# Altium PCB main_old.PcbDoc (part 7 of 15)
Units mil, origin at the board's own origin, x right, y up, seen from the top; angles counter-clockwise.
Board outline 8394.55 x 5164.44 mil, 7 copper layers (Top Layer 1, Layer 2, Layer 3, Unused, Layer 4_pow, Layer 5_gnd, Bottom 6+gnd), stack 46.112 mil thick; 363 components, 409 nets, 1750 pads, 991 vias.
Unrouted connection lines stored in the file: 1.
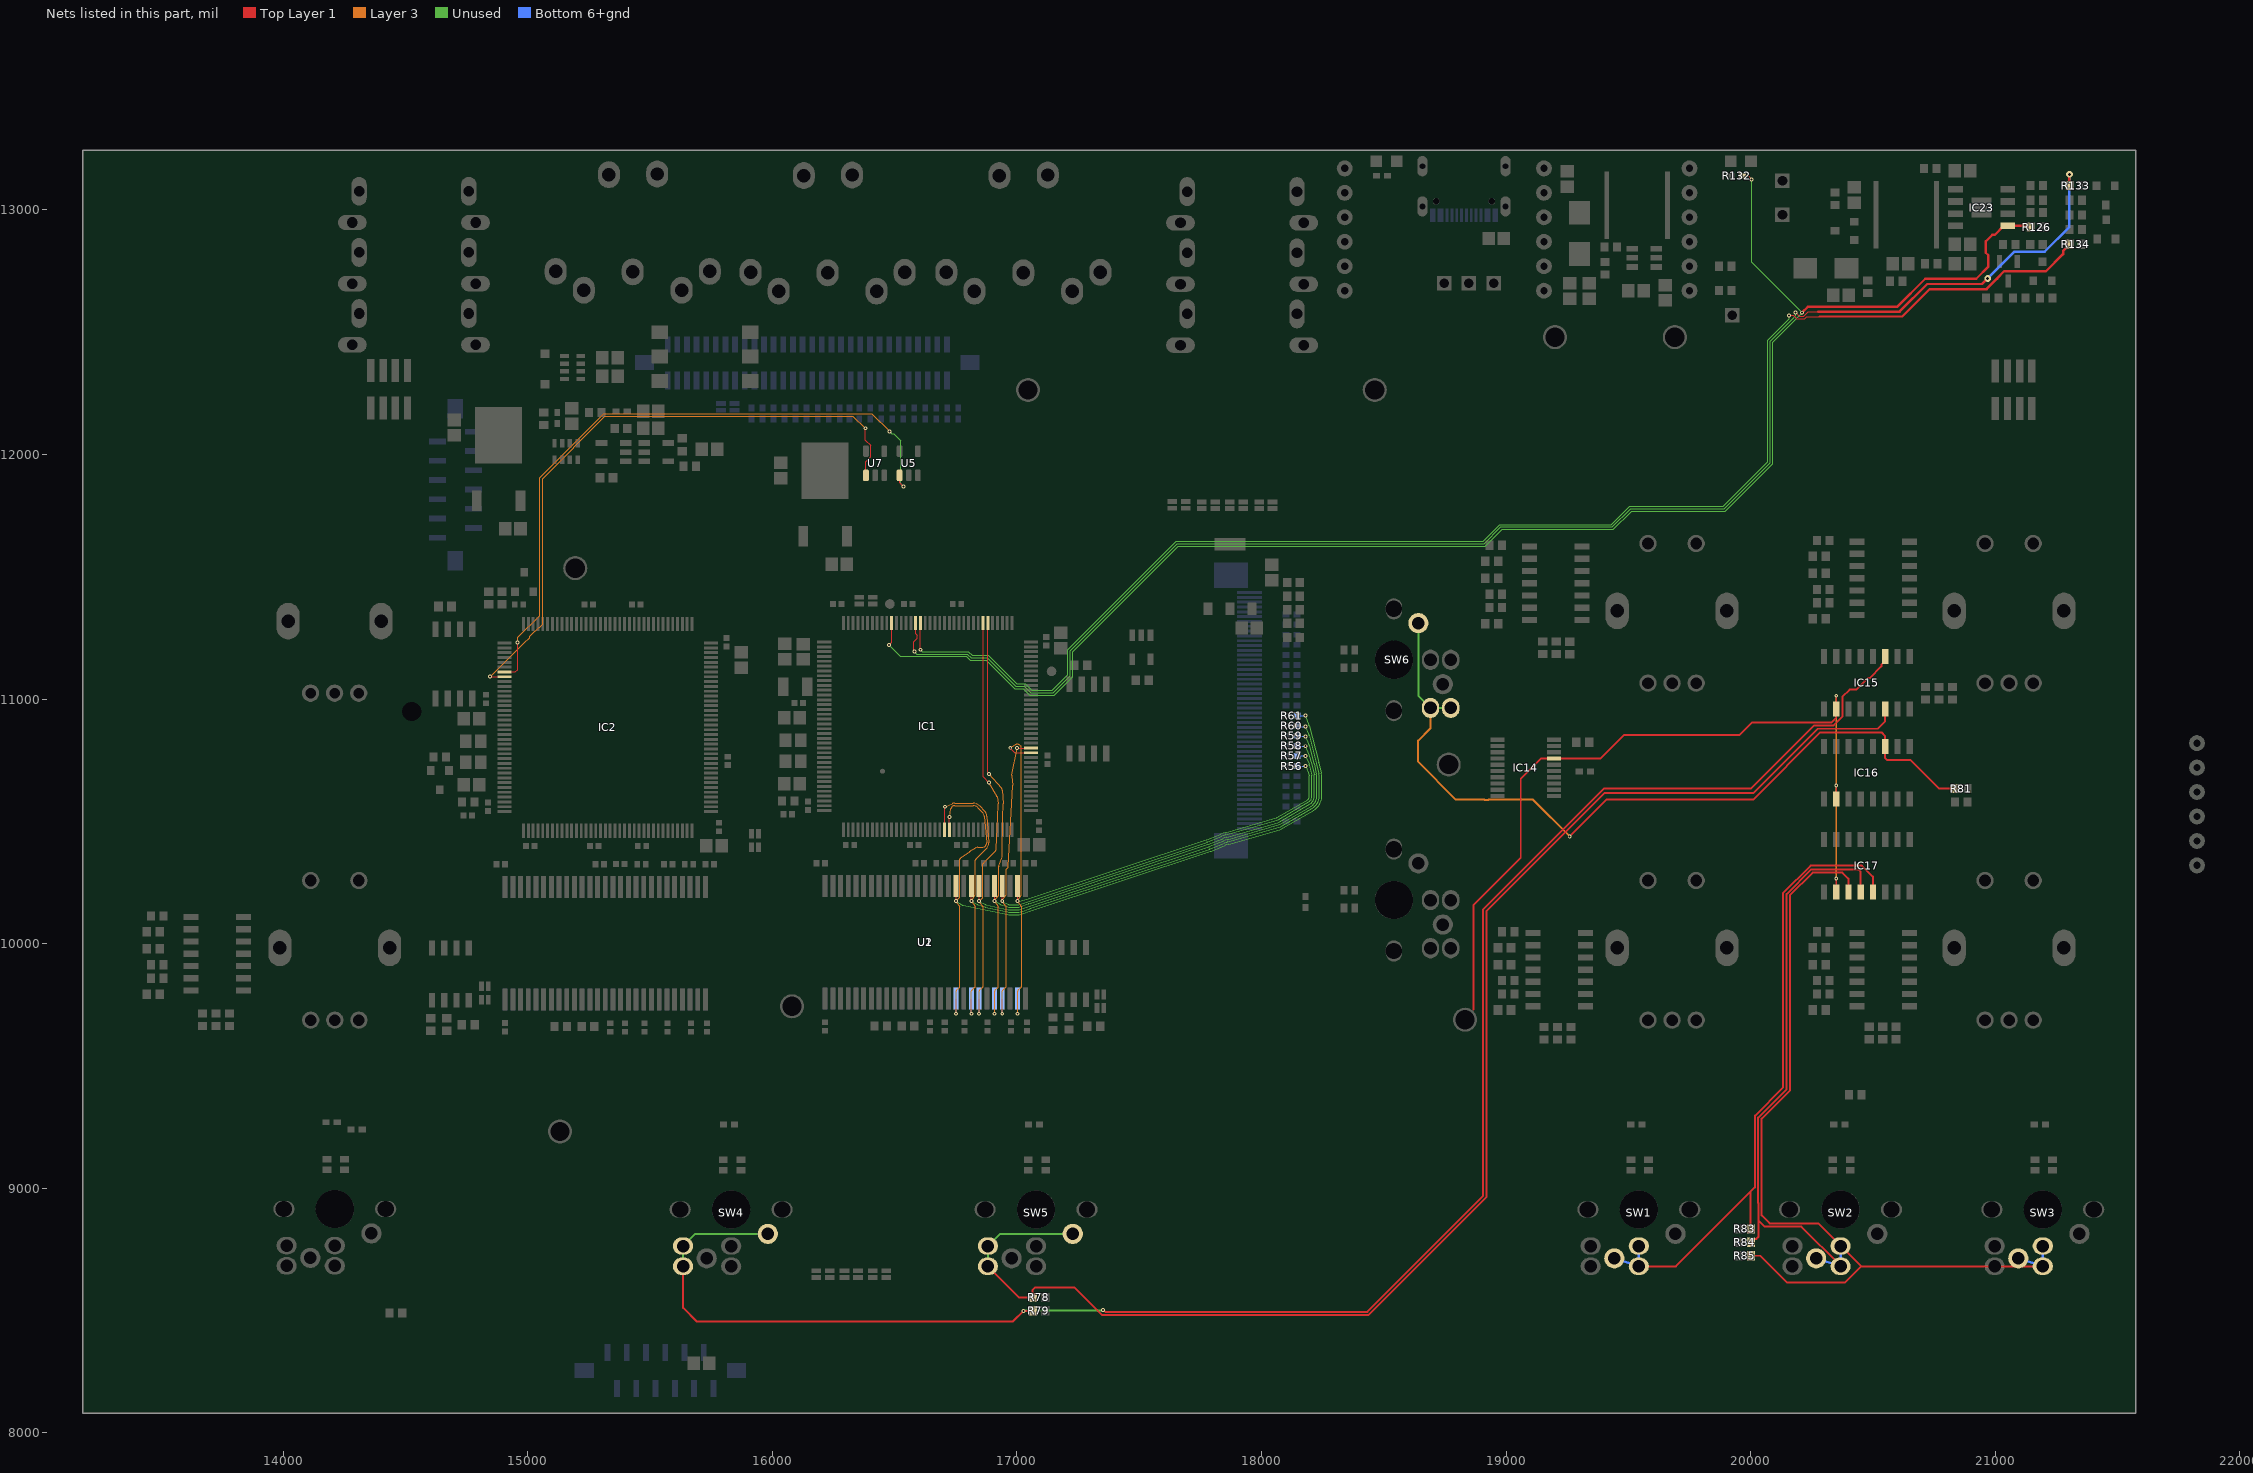
[diagram p10: the nets of this part, all layers, seen from the top]

## Via types
v1: diameter 15.75, hole 7.87, Top Layer 1 to Bottom 6+gnd, tented both sides, 923 vias
v2: diameter 27.56, hole 11.81, Top Layer 1 to Bottom 6+gnd, 45 vias
v3: diameter 23.62/23.62/23.62/23.62/23.62/23.62/23.62 (per signal layer), hole 12, Top Layer 1 to Bottom 6+gnd, tented top, 10 vias
v4: diameter 15.75, hole 7.87, Top Layer 1 to Bottom 6+gnd, 10 vias
v5: diameter 23.62/23.62/23.62/23.62/23.62/23.62/23.62 (per signal layer), hole 12, Top Layer 1 to Bottom 6+gnd, tented bottom, 3 vias

## Nets (pads, with @x,y where several pads share a name; then routed paths per layer and width w, separated by ;. In a path a pad name is that pad's centre, name@x,y a point inside that pad or via, vN(x,y) a via of type N, cw(c..) or ccw(c..) an arc to the next point about the centre after c; other vN are vias at no path point) (continued)
BTN_N: IC15.6 R78.1 SW5.S1 | length 5994.2
  Top Layer 1 w8: SW5.S1@16881.21,8680.84 17008.23,8553.82 R78.1@17064.41,8553.82 17064.41,8584.41 17075,8595 17233.82,8595 17347,8481.82 18438,8481.82 18920.7,8964.52 18920.7,10134.12 19403.4,10616.82 20012.01,10616.82 20273.92,10878.73 20519.91,10878.73 20550,10908.82 IC15.6@20550,10959.25
  Unused w8: SW5.S1@16881.21,8680.84 SW5.S1@16881.21,8763.52 16930.82,8813.12 SW5.S1@17228.06,8813.12
BTN_PLAY: IC17.4 R84.1 SW2.S2 | length 2524.6
  Top Layer 1 w8: R84.1@20001.18,8778.82 20001.18,8780.12 20013.91,8792.85 20023.55,8792.85 20031.23,8800.53 20031.23,8869.87 ; 20030.85,8939.59 20030.85,9288.45 20147,9404.61 20147,10202.43 20248.38,10303.82 20440,10303.82 20450,10293.82 IC17.4@20450,10211.53 ; 20031.23,8939.2 20031.23,8869.87 ; SW2.S2@20367.72,8680.84 20367.72,8682.94 20207.39,8843.28 20057.82,8843.28 20031.23,8869.87
  Bottom 6+gnd w10: SW2.S2@20267.72,8713.12 SW2.S2@20367.72,8680.84 SW2.S2@20367.72,8763.52
BTN_REC: IC17.5 R83.1 SW1.S2 | length 2694.4
  Top Layer 1 w8: SW1.S2@19542.61,8680.84 19694.02,8680.84 20000,8986.82 ; R83.1@20001.18,8833.82 20000,8835 20000,8986.82 ; 20017,9003.82 20000,8986.82 ; 20017.85,9003.82 20017.85,9296.67 20132,9410.82 20132,10205.82 20245,10318.82 20455,10318.82 20500,10273.82 IC17.5@20500,10211.53
  Bottom 6+gnd w10: SW1.S2@19442.61,8713.12 SW1.S2@19542.61,8680.84 SW1.S2@19542.61,8763.52
BTN_STOP: IC17.3 R85.1 SW3.S2 | length 3647.3
  Top Layer 1 w8: R85.1@20001.18,8723.82 20040,8723.82 20150,8613.82 20385.37,8613.82 20452.39,8680.84 ; IC17.3@20400,10211.53 20400,10265.82 20375,10290.82 20253.77,10290.82 20160,10197.05 20160,9399.22 20045,9284.22 20045,8888.82 20077.54,8856.28 20276.62,8856.28 20452.06,8680.84 SW3.S2@21194.5,8680.84
  Bottom 6+gnd w10: SW3.S2@21094.5,8713.12 SW3.S2@21194.5,8680.84 SW3.S2@21194.5,8763.52
BTN_UP: IC16.11 R81.1 SW6.S1 | length 3328.2
  Top Layer 1 w8: v1(19260,10438.82) 19410,10588.82 20010,10588.82 20285,10863.82 20535,10863.82 20550,10848.82 IC16.11@20550,10806.1 20550,10758.82 20557,10751.82 20652.92,10751.82 20770.92,10633.82 R81.1@20825,10633.82
  Unused w8: SW6.S1@18641.34,11310.81 18641.34,11013.57 SW6.S1@18690.94,10963.96 SW6.S1@18773.62,10963.96
  Layer 3 w8: SW6.S1@18690.94,10963.96 18690.94,10880.94 18640,10830 18640,10743.82 18795,10588.82 18911.14,10588.82 18913.01,10586.94 18926.99,10586.94 18928.86,10588.82 19110,10588.82 v1(19260,10438.82)
BTN_Y: IC15.11 R79.1 SW4.S1 | length 7476.5
  Top Layer 1 w8: SW4.S1@15634.53,8680.84 15634.53,8510.47 15690,8455 16983.35,8455 v1(17026.82,8498.48) 17027.17,8498.82 R79.1@17064.41,8498.82 ; v1@17352.2,8501.62 17354.21,8501.62 17361.01,8494.82 18432.62,8494.82 18905,8967.2 18905,10138.82 19400,10633.82 20000,10633.82 20257.91,10891.73 20338.51,10891.73 20375,10928.22 20375,11008.82 20405,11038.82 20432.72,11038.82 20479.72,11085.82 20486.42,11085.82 20534.8,11134.19 20534.8,11140.9 20550,11156.1 IC15.11@20550,11173.82
  Unused w8: SW4.S1@15634.53,8680.84 SW4.S1@15634.53,8763.52 15684.14,8813.12 SW4.S1@15981.38,8813.12 ; v1(17026.82,8498.48) 17027.89,8499.54 17348.27,8499.54 17350.35,8501.62 v1(17352.45,8501.62)
CHARGE_STATUS: IC1.134 IC23.1 R126.1 R132.2 | length 6747.1
  Top Layer 1 w5: v1(16476.56,11221.38) 16487.36,11232.18 IC1.134@16487.36,11311.57 ; R132.2@19965.28,13140 19990.5,13140 20004.12,13126.37 v1(20004.12,13124.93)
  Top Layer 1 w10: v1(20210,12580) 20233.43,12603.43 20598.56,12603.43 20714.13,12719.01 20922.31,12719.01 20971.8,12768.49 20971.8,12814.72 20961.24,12825.28 20961.24,12871.51 20988.59,12898.86 20998.41,12898.86 21034.55,12935 IC23.1@21050.79,12935 21139.02,12935 R126.1@21144.02,12930
  Unused w5: v1(16476.56,11221.38) 16523.67,11174.27 16792.54,11174.27 16808,11158.82 16873.89,11158.82 16990.97,11041.74 17025.37,11041.74 17051.28,11015.83 17151.86,11015.83 17228,11091.96 17228,11193.54 17659.85,11625.39 18914.86,11625.39 18983.28,11693.82 19438.28,11693.82 19512.91,11768.44 19896.73,11768.44 20090,11961.72 20090,12460.03 v1(20210,12580) ; v1(20004.12,13124.93) 20004.12,12785.88 v1(20210,12580)
CHR1: IC1.129 R133.1 | length 6342.4
  Top Layer 1 w5: v1(16580.55,11194.81) 16578.49,11196.87 16578.49,11201.01 16577.87,11201.63 16577.87,11235.25 16591.46,11248.84 16591.46,11261.57 16585.79,11267.24 IC1.129@16585.79,11311.57 ; v1(20183.45,12580.88) 20199.71,12564.63 20216.37,12564.63 20235.9,12584.16 20276.92,12584.16
  Top Layer 1 w10: 20276.92,12584.16 20608.99,12584.16 20722.03,12697.2 20946.22,12697.2 v2(20969.02,12720) ; v2(21303.47,13145.76) 21303.47,13100.54 R133.1@21304.02,13100
  Unused w5: v1(16580.55,11194.81) 16580.55,11193.96 16590.23,11184.27 16796.68,11184.27 16812.14,11168.82 16878.03,11168.82 16995.11,11051.74 17029.51,11051.74 17055.42,11025.83 17147.72,11025.83 17218,11096.11 17218,11197.68 17655.7,11635.39 18910.71,11635.39 18979.14,11703.82 19434.14,11703.82 19508.77,11778.44 19892.59,11778.44 20080,11965.86 20080,12464.17 20184,12568.17 20184,12580.33 v1(20183.45,12580.88)
  Bottom 6+gnd w10: v2(20969.02,12720) 21079.02,12830 21202.72,12830 21303.47,12930.75 v2(21303.47,13145.76)
CHR2: IC1.128 R134.1 | length 6012.3
  Top Layer 1 w5: IC1.128@16605.47,11311.57 16605.47,11201.77 v1(16605.52,11201.72) ; v1(20157,12569) 20173.59,12569 20187.97,12554.63 20220.51,12554.63 20230.28,12564.4 20281.6,12564.4
  Top Layer 1 w10: 20281.6,12564.3 20620.09,12564.3 20732.36,12676.57 20964.88,12676.57 21007.44,12719.14 21007.44,12720.23 21036.59,12749.37 21072.59,12749.37 21207.28,12749.37 21277.36,12819.45 21277.36,12832.55 21302.83,12858.03 R134.1@21302.83,12860
  Unused w5: v1(16605.52,11201.72) 16606.02,11201.72 16613.47,11194.27 16801.56,11194.27 16817.02,11178.82 16882.17,11178.82 16999.25,11061.74 17033.65,11061.74 17059.56,11035.83 17143.58,11035.83 17208,11100.25 17208,11201.83 17651.56,11645.39 18906.57,11645.39 18975,11713.82 19430,11713.82 19504.63,11788.44 19888.44,11788.44 20070,11970 20070,12468.31 20157,12555.31 v1(20157,12569)
CLK: IC14.17 IC15.2 IC16.2 IC17.2 | length 3363.2
  Top Layer 1 w8: 18865.99,9731.43 18865.99,10156.43 19060,10350.43 19060,10673.82 19143.39,10757.2 IC14.17@19195.67,10757.2 19386.77,10757.2 19483.38,10853.82 19955,10853.82 20005.91,10904.73 20330.91,10904.73 20350,10923.82 IC15.2@20350,10959.25 v1(20350,11013.82) ; IC17.2@20350,10211.53 v1(20350,10266.1) ; IC16.2@20350,10591.53 v1(20350,10646.1)
  Layer 3 w8: v1(20350,10266.1) v1(20350,10646.1) v1(20350,11013.82)
CODEC_GPIO1: IC2.7 U5.1 | length 2755.6
  Top Layer 1 w5: IC2.7@14904,11111.01 14949.08,11111.01 14958.33,11120.26 14958.33,11230.5 v1(14957.71,11231.13) ; U5.1@16520,11915 16520,11885 v1(16535.91,11869.09)
  Unused w5: v1(16479.29,12094.57) 16488.49,12085.37 16495.51,12085.37 16525,12055.88 16525,11880 v1(16535.91,11869.09)
  Layer 3 w5: v1(14957.71,11231.13) 14959.76,11233.19 14959.76,11252.74 15048.42,11341.4 15048.42,11904.44 15311.34,12167.36 16406.46,12167.36 v1(16479.29,12094.57)
CODEC_GPIO2: IC2.8 U7.1 | length 2615.9
  Top Layer 1 w5: v1(14845.83,11092.54) 14847.05,11091.32 IC2.8@14904,11091.32 ; v1(16380.62,12107.57) 16380.62,12058.44 16401.71,12037.34 16401.71,11990.29 16382.6,11971.18 U7.1@16382.6,11915
  Layer 3 w5: v1(14845.83,11092.54) 14847.54,11092.54 14985,11230 14986.36,11230 15008.18,11251.82 15008.18,11256.99 15030,11278.81 15031.88,11278.81 15060,11306.93 15060,11901.88 15315.49,12157.36 16329.2,12157.36 16378.99,12107.57 v1(16380.62,12107.57)
D0: IC1.85 R56.2 U1.2 U2.2 | length 2818.1
  Top Layer 1 w5: v1(16972.41,10800.87) 16972.41,10799.7 16991.56,10780.55 IC1.85@17057.76,10780.55 ; v1(17002.71,10174.13) 17002.71,10193.72 U1.2@17002.95,10236.22
  Unused w5: v1(17002.71,10174.13) 17007.71,10174.13 ccw(c17007.71,10179.13) 17008.96,10174.29 17046.33,10183.96 ccw(c17044.45,10191.22) 17046.8,10184.1 17774.77,10424.93 ccw(c17770.06,10439.17) 17775.68,10425.27 17833.53,10448.1 cw(c17906.89,10262.58) 17851.59,10454.26 18060.03,10514.57 cw(c18062.86,10504.98) 18060.22,10514.62 ccw(c18056.25,10529.09) 18063.81,10516.13 18188.17,10588.71 ccw(c18180.42,10601.98) 18195.79,10601.98 18195.79,10681.98 ccw(c18180.42,10681.98) 18194.87,10687.24 v1(18180.42,10726.98)
  Layer 3 w5: v1(16972.41,10800.87) 16972.41,10801.09 16972.14,10801.37 16993.31,10813.13 cw(c17000.78,10799.69) 17008.7,10812.87 17015.67,10808.67 cw(c17013.1,10804.39) 17018.1,10804.48 17018.1,10200.46 cw(c17013.1,10200.55) 17017.28,10197.8 17003.53,10176.88 ccw(c17007.71,10174.13) 17002.71,10174.19 v1(17002.71,10174.13) ccw(c17007.71,10174.13) 17003.76,10171.06 17017.78,10152.99 cw(c17013.83,10149.93) 17018.83,10150.02 17018.83,9825.33 cw(c17013.83,9825.42) 17017.37,9821.89 17004.15,9808.63 ccw(c17007.71,9805.12) 17002.71,9805.12 v1(17002.71,9713.5)
  Bottom 6+gnd w5: v1@17002.95,9713.75 U2.2@17002.95,9775.59 ; R56.2@18145.28,10726.14 18179.57,10726.14 v1(18180.42,10726.98)
D1: IC1.86 R57.2 U1.4 U2.4 | length 3162.8
  Top Layer 1 w5: v1(16939.72,10174.13) U1.4@16939.72,10235.97 ; v1(17000.78,10799.69) 17001.05,10799.96 17057.48,10799.96 IC1.86@17057.6,10800.08
  Unused w5: v1(16939.72,10174.13) 16941.2,10172.65 ccw(c16944.72,10176.21) 16942.41,10171.77 16964.17,10160.47 ccw(c16971.21,10174.13) 16971.21,10158.76 17002.71,10158.76 ccw(c17002.71,10174.13) 17007.91,10159.67 17043.25,10171.96 cw(c17068.11,10100.81) 17044.4,10172.35 17777.94,10415.45 ccw(c17770.06,10439.17) 17779.35,10415.97 17837.23,10438.81 cw(c17906.89,10262.58) 17854.35,10444.65 18062.86,10504.98 cw(c18065.64,10495.37) 18062.92,10504.99 ccw(c18056.25,10529.09) 18068.85,10507.5 18193.21,10580.07 ccw(c18180.42,10601.98) 18205.79,10601.98 18205.79,10681.98 ccw(c18180.42,10681.98) 18205.16,10687.62 18195.41,10730.4 ccw(c18180.42,10726.98) 18194.47,10733.21 v1(18179.31,10767.45)
  Layer 3 w5: v1(16939.72,9713.5) 16939.72,9805.11 cw(c16944.72,9805.12) 16941.16,9808.63 16954.38,9821.89 ; 16963.54,10312.37 16955.84,10304.67 16955.84,10201.19 ; v1(17000.78,10799.69) 16978.75,10688.37 ; 16954.38,9821.89 ccw(c16950.84,9825.42) 16955.84,9825.33 ; 16954.38,9821.89 ccw(c16950.84,9825.42) 16955.84,9825.33 ; 16954.38,9821.89 ccw(c16950.84,9825.42) 16955.84,9825.33 ; 16954.38,9821.89 ccw(c16950.84,9825.42) 16955.84,9825.33 ; 16954.38,9821.89 ccw(c16950.84,9825.42) 16955.84,9825.33 ; 16954.38,9821.89 ccw(c16950.84,9825.42) 16955.84,9825.33 ; 16954.38,9821.89 ccw(c16950.84,9825.42) 16955.84,9825.33 ; 16954.38,9821.89 ccw(c16950.84,9825.42) 16955.84,9825.33 ; 16954.38,9821.89 ccw(c16950.84,9825.42) 16955.84,9825.33 ; 16954.38,9821.89 ccw(c16950.84,9825.42) 16955.84,9825.33 ; 16954.38,9821.89 ccw(c16950.84,9825.42) 16955.84,9825.33 ; 16954.38,9821.89 ccw(c16950.84,9825.42) 16955.84,9825.33 ; 16954.38,9821.89 ccw(c16950.84,9825.42) 16955.84,9825.33 ; 16954.38,9821.89 ccw(c16950.84,9825.42) 16955.84,9825.33 ; 16954.38,9821.89 ccw(c16950.84,9825.42) 16955.84,9825.33 ; 16954.38,9821.89 ccw(c16950.84,9825.42) 16955.84,9825.33 ; 16954.79,10152.99 cw(c16950.84,10149.93) 16955.84,10150.02 ; 16954.79,10152.99 cw(c16950.84,10149.93) 16955.84,10150.02 ; 16954.79,10152.99 cw(c16950.84,10149.93) 16955.84,10150.02 ; 16954.79,10152.99 cw(c16950.84,10149.93) 16955.84,10150.02 ; 16954.79,10152.99 cw(c16950.84,10149.93) 16955.84,10150.02 ; 16954.79,10152.99 cw(c16950.84,10149.93) 16955.84,10150.02 ; 16954.79,10152.99 cw(c16950.84,10149.93) 16955.84,10150.02 ; 16954.79,10152.99 cw(c16950.84,10149.93) 16955.84,10150.02 ; 16954.79,10152.99 cw(c16950.84,10149.93) 16955.84,10150.02 ; 16954.79,10152.99 cw(c16950.84,10149.93) 16955.84,10150.02 ; 16954.79,10152.99 cw(c16950.84,10149.93) 16955.84,10150.02 ; 16954.79,10152.99 cw(c16950.84,10149.93) 16955.84,10150.02 ; 16954.79,10152.99 cw(c16950.84,10149.93) 16955.84,10150.02 ; 16954.79,10152.99 cw(c16950.84,10149.93) 16955.84,10150.02 ; 16954.79,10152.99 cw(c16950.84,10149.93) 16955.84,10150.02 ; 16954.79,10152.99 cw(c16950.84,10149.93) 16955.84,10150.02 ; 16954.79,10152.99 16940.77,10171.06 cw(c16944.72,10174.13) v1(16939.72,10174.13) 16939.72,10174.19 cw(c16944.72,10174.13) 16940.55,10176.9 16955,10198.5 ; 16955,10198.5 ccw(c16950.84,10201.28) 16955.84,10201.19 ; 16955,10198.5 ccw(c16950.84,10201.28) 16955.84,10201.19 ; 16955,10198.5 ccw(c16950.84,10201.28) 16955.84,10201.19 ; 16955,10198.5 ccw(c16950.84,10201.28) 16955.84,10201.19 ; 16955,10198.5 ccw(c16950.84,10201.28) 16955.84,10201.19 ; 16955,10198.5 ccw(c16950.84,10201.28) 16955.84,10201.19 ; 16955,10198.5 ccw(c16950.84,10201.28) 16955.84,10201.19 ; 16955,10198.5 ccw(c16950.84,10201.28) 16955.84,10201.19 ; 16955,10198.5 ccw(c16950.84,10201.28) 16955.84,10201.19 ; 16955,10198.5 ccw(c16950.84,10201.28) 16955.84,10201.19 ; 16955,10198.5 ccw(c16950.84,10201.28) 16955.84,10201.19 ; 16955,10198.5 ccw(c16950.84,10201.28) 16955.84,10201.19 ; 16955,10198.5 ccw(c16950.84,10201.28) 16955.84,10201.19 ; 16955,10198.5 ccw(c16950.84,10201.28) 16955.84,10201.19 ; 16955,10198.5 ccw(c16950.84,10201.28) 16955.84,10201.19 ; 16955,10198.5 ccw(c16950.84,10201.28) 16955.84,10201.19 ; 16955.84,9825.33 16955.84,10150.02 ; 16963.55,10312.39 ccw(c16959.97,10315.88) 16964.96,10315.61 ; 16963.55,10312.39 ccw(c16959.97,10315.88) 16964.96,10315.61 ; 16963.55,10312.39 ccw(c16959.97,10315.88) 16964.96,10315.61 ; 16963.55,10312.39 ccw(c16959.97,10315.88) 16964.96,10315.61 ; 16963.55,10312.39 ccw(c16959.97,10315.88) 16964.96,10315.61 ; 16963.55,10312.39 ccw(c16959.97,10315.88) 16964.96,10315.61 ; 16963.55,10312.39 ccw(c16959.97,10315.88) 16964.96,10315.61 ; 16963.55,10312.39 ccw(c16959.97,10315.88) 16964.96,10315.61 ; 16963.55,10312.39 ccw(c16959.97,10315.88) 16964.96,10315.61 ; 16963.55,10312.39 ccw(c16959.97,10315.88) 16964.96,10315.61 ; 16963.55,10312.39 ccw(c16959.97,10315.88) 16964.96,10315.61 ; 16963.55,10312.39 ccw(c16959.97,10315.88) 16964.96,10315.61 ; 16963.55,10312.39 ccw(c16959.97,10315.88) 16964.96,10315.61 ; 16963.55,10312.39 ccw(c16959.97,10315.88) 16964.96,10315.61 ; 16963.55,10312.39 ccw(c16959.97,10315.88) 16964.96,10315.61 ; 16963.55,10312.39 ccw(c16959.97,10315.88) 16964.96,10315.61 ; 16964.96,10315.61 16982.44,10645.65 ; 16978.56,10683.74 cw(c16993.84,10685.43) 16978.75,10688.37 ; 16978.56,10683.74 cw(c16993.84,10685.43) 16978.75,10688.37 ; 16978.56,10683.74 cw(c16993.84,10685.43) 16978.75,10688.37 ; 16978.56,10683.74 cw(c16993.84,10685.43) 16978.75,10688.37 ; 16978.56,10683.74 cw(c16993.84,10685.43) 16978.75,10688.37 ; 16978.56,10683.74 cw(c16993.84,10685.43) 16978.75,10688.37 ; 16978.56,10683.74 cw(c16993.84,10685.43) 16978.75,10688.37 ; 16978.56,10683.74 cw(c16993.84,10685.43) 16978.75,10688.37 ; 16978.56,10683.74 cw(c16993.84,10685.43) 16978.75,10688.37 ; 16978.56,10683.74 cw(c16993.84,10685.43) 16978.75,10688.37 ; 16978.56,10683.74 cw(c16993.84,10685.43) 16978.75,10688.37 ; 16978.56,10683.74 cw(c16993.84,10685.43) 16978.75,10688.37 ; 16978.56,10683.74 cw(c16993.84,10685.43) 16978.75,10688.37 ; 16978.56,10683.74 cw(c16993.84,10685.43) 16978.75,10688.37 ; 16978.56,10683.74 cw(c16993.84,10685.43) 16978.75,10688.37 ; 16978.56,10683.74 cw(c16993.84,10685.43) 16978.75,10688.37 ; 16978.56,10683.74 16982.38,10648.16 ; 16982.38,10648.16 cw(c16967.09,10646.51) 16982.44,10645.65 ; 16982.38,10648.16 cw(c16967.09,10646.51) 16982.44,10645.65 ; 16982.38,10648.16 cw(c16967.09,10646.51) 16982.44,10645.65 ; 16982.38,10648.16 cw(c16967.09,10646.51) 16982.44,10645.65 ; 16982.38,10648.16 cw(c16967.09,10646.51) 16982.44,10645.65 ; 16982.38,10648.16 cw(c16967.09,10646.51) 16982.44,10645.65 ; 16982.38,10648.16 cw(c16967.09,10646.51) 16982.44,10645.65 ; 16982.38,10648.16 cw(c16967.09,10646.51) 16982.44,10645.65 ; 16982.38,10648.16 cw(c16967.09,10646.51) 16982.44,10645.65 ; 16982.38,10648.16 cw(c16967.09,10646.51) 16982.44,10645.65 ; 16982.38,10648.16 cw(c16967.09,10646.51) 16982.44,10645.65 ; 16982.38,10648.16 cw(c16967.09,10646.51) 16982.44,10645.65 ; 16982.38,10648.16 cw(c16967.09,10646.51) 16982.44,10645.65 ; 16982.38,10648.16 cw(c16967.09,10646.51) 16982.44,10645.65 ; 16982.38,10648.16 cw(c16967.09,10646.51) 16982.44,10645.65 ; 16982.38,10648.16 cw(c16967.09,10646.51) 16982.44,10645.65
  Bottom 6+gnd w5: v1@16939.96,9713.75 U2.4@16939.96,9775.59 ; R57.2@18145.28,10767.45 v1(18179.31,10767.45)
D2: IC1.114 R58.2 U1.5 U2.5 | length 3747.1
  Top Layer 1 w5: IC1.114@16881.06,11311.57 16881.06,10700.66 16885,10696.73 v1(16885,10693.82) ; v1(16908.22,10174.13) 16908.22,10193.72 U1.5@16908.46,10236.22
  Unused w5: v1@16910.7,10172.67 ccw(c16913.22,10176.99) 16910.79,10172.62 16932.32,10160.65 ccw(c16939.72,10174.13) 16934.77,10159.58 16963.19,10150.06 ccw(c16971.21,10174.13) 16971.21,10148.76 17002.71,10148.76 ccw(c17002.71,10174.13) 17011.17,10150.21 17046.53,10162.52 cw(c17068.11,10100.81) 17047.55,10162.86 17781.05,10405.95 ccw(c17770.06,10439.17) 17783.02,10406.66 17840.95,10429.53 cw(c17906.89,10262.58) 17857.09,10435.03 18065.64,10495.37 ccw(c18056.25,10529.09) 18073.89,10498.86 18198.25,10571.43 ccw(c18180.42,10601.98) 18215.79,10601.98 18215.79,10681.98 ccw(c18180.42,10681.98) 18214.91,10689.85 18205.16,10732.62 ccw(c18180.42,10726.98) 18204.82,10733.92 18194.1,10771.66 ccw(c18179.31,10767.45) 18193.5,10773.36 v1(18179.31,10807.45)
  Layer 3 w5: v1(16885,10693.82) 16935.99,10637.17 cw(c16924.56,10626.89) 16939.9,10627.9 16939.91,10627.74 16943.06,10572.32 ; v1(16908.22,9713.5) 16908.22,9805.11 cw(c16913.22,9805.12) 16909.67,9808.63 16922.88,9821.89 ; 16922.88,9821.89 ccw(c16919.34,9825.42) 16924.34,9825.33 ; 16922.88,9821.89 ccw(c16919.34,9825.42) 16924.34,9825.33 ; 16922.88,9821.89 ccw(c16919.34,9825.42) 16924.34,9825.33 ; 16922.88,9821.89 ccw(c16919.34,9825.42) 16924.34,9825.33 ; 16922.88,9821.89 ccw(c16919.34,9825.42) 16924.34,9825.33 ; 16922.88,9821.89 ccw(c16919.34,9825.42) 16924.34,9825.33 ; 16922.88,9821.89 ccw(c16919.34,9825.42) 16924.34,9825.33 ; 16922.88,9821.89 ccw(c16919.34,9825.42) 16924.34,9825.33 ; 16922.88,9821.89 ccw(c16919.34,9825.42) 16924.34,9825.33 ; 16922.88,9821.89 ccw(c16919.34,9825.42) 16924.34,9825.33 ; 16922.88,9821.89 ccw(c16919.34,9825.42) 16924.34,9825.33 ; 16922.88,9821.89 ccw(c16919.34,9825.42) 16924.34,9825.33 ; 16922.88,9821.89 ccw(c16919.34,9825.42) 16924.34,9825.33 ; 16922.88,9821.89 ccw(c16919.34,9825.42) 16924.34,9825.33 ; 16922.88,9821.89 ccw(c16919.34,9825.42) 16924.34,9825.33 ; 16922.88,9821.89 ccw(c16919.34,9825.42) 16924.34,9825.33 ; 16923.29,10152.99 cw(c16919.34,10149.93) 16924.34,10150.02 ; 16923.29,10152.99 cw(c16919.34,10149.93) 16924.34,10150.02 ; 16923.29,10152.99 cw(c16919.34,10149.93) 16924.34,10150.02 ; 16923.29,10152.99 cw(c16919.34,10149.93) 16924.34,10150.02 ; 16923.29,10152.99 cw(c16919.34,10149.93) 16924.34,10150.02 ; 16923.29,10152.99 cw(c16919.34,10149.93) 16924.34,10150.02 ; 16923.29,10152.99 cw(c16919.34,10149.93) 16924.34,10150.02 ; 16923.29,10152.99 cw(c16919.34,10149.93) 16924.34,10150.02 ; 16923.29,10152.99 cw(c16919.34,10149.93) 16924.34,10150.02 ; 16923.29,10152.99 cw(c16919.34,10149.93) 16924.34,10150.02 ; 16923.29,10152.99 cw(c16919.34,10149.93) 16924.34,10150.02 ; 16923.29,10152.99 cw(c16919.34,10149.93) 16924.34,10150.02 ; 16923.29,10152.99 cw(c16919.34,10149.93) 16924.34,10150.02 ; 16923.29,10152.99 cw(c16919.34,10149.93) 16924.34,10150.02 ; 16923.29,10152.99 cw(c16919.34,10149.93) 16924.34,10150.02 ; 16923.29,10152.99 cw(c16919.34,10149.93) 16924.34,10150.02 ; 16923.29,10152.99 16909.3,10171.03 cw(c16913.22,10174.13) v1(16908.22,10174.13) 16908.22,10174.19 cw(c16913.22,10174.13) 16909.3,10177.24 16923.75,10195.45 ; 16923.75,10195.45 ccw(c16919.83,10198.56) 16924.83,10198.47 ; 16923.75,10195.45 ccw(c16919.83,10198.56) 16924.83,10198.47 ; 16923.75,10195.45 ccw(c16919.83,10198.56) 16924.83,10198.47 ; 16923.75,10195.45 ccw(c16919.83,10198.56) 16924.83,10198.47 ; 16923.75,10195.45 ccw(c16919.83,10198.56) 16924.83,10198.47 ; 16923.75,10195.45 ccw(c16919.83,10198.56) 16924.83,10198.47 ; 16923.75,10195.45 ccw(c16919.83,10198.56) 16924.83,10198.47 ; 16923.75,10195.45 ccw(c16919.83,10198.56) 16924.83,10198.47 ; 16923.75,10195.45 ccw(c16919.83,10198.56) 16924.83,10198.47 ; 16923.75,10195.45 ccw(c16919.83,10198.56) 16924.83,10198.47 ; 16923.75,10195.45 ccw(c16919.83,10198.56) 16924.83,10198.47 ; 16923.75,10195.45 ccw(c16919.83,10198.56) 16924.83,10198.47 ; 16923.75,10195.45 ccw(c16919.83,10198.56) 16924.83,10198.47 ; 16923.75,10195.45 ccw(c16919.83,10198.56) 16924.83,10198.47 ; 16923.75,10195.45 ccw(c16919.83,10198.56) 16924.83,10198.47 ; 16923.75,10195.45 ccw(c16919.83,10198.56) 16924.83,10198.47 ; 16924.34,9825.33 16924.34,10150.02 ; 16924.83,10198.47 16924.83,10314.09 cw(c16929.83,10314.1) 16925.19,10315.95 16938.56,10349.4 ; 16938.56,10349.4 ccw(c16915,10358.82) 16940.37,10358.48 ; 16938.56,10349.4 ccw(c16915,10358.82) 16940.37,10358.48 ; 16938.56,10349.4 ccw(c16915,10358.82) 16940.37,10358.48 ; 16938.56,10349.4 ccw(c16915,10358.82) 16940.37,10358.48 ; 16938.56,10349.4 ccw(c16915,10358.82) 16940.37,10358.48 ; 16938.56,10349.4 ccw(c16915,10358.82) 16940.37,10358.48 ; 16938.56,10349.4 ccw(c16915,10358.82) 16940.37,10358.48 ; 16938.56,10349.4 ccw(c16915,10358.82) 16940.37,10358.48 ; 16938.56,10349.4 ccw(c16915,10358.82) 16940.37,10358.48 ; 16938.56,10349.4 ccw(c16915,10358.82) 16940.37,10358.48 ; 16938.56,10349.4 ccw(c16915,10358.82) 16940.37,10358.48 ; 16938.56,10349.4 ccw(c16915,10358.82) 16940.37,10358.48 ; 16938.56,10349.4 ccw(c16915,10358.82) 16940.37,10358.48 ; 16938.56,10349.4 ccw(c16915,10358.82) 16940.37,10358.48 ; 16938.56,10349.4 ccw(c16915,10358.82) 16940.37,10358.48 ; 16938.56,10349.4 ccw(c16915,10358.82) 16940.37,10358.48 ; 16940.37,10358.48 16942.46,10516.74 16943.11,10569.88 ; 16943.06,10572.32 cw(c16907.74,10570.31) 16943.11,10569.88 ; 16943.06,10572.32 cw(c16907.74,10570.31) 16943.11,10569.88 ; 16943.06,10572.32 cw(c16907.74,10570.31) 16943.11,10569.88 ; 16943.06,10572.32 cw(c16907.74,10570.31) 16943.11,10569.88 ; 16943.06,10572.32 cw(c16907.74,10570.31) 16943.11,10569.88 ; 16943.06,10572.32 cw(c16907.74,10570.31) 16943.11,10569.88 ; 16943.06,10572.32 cw(c16907.74,10570.31) 16943.11,10569.88 ; 16943.06,10572.32 cw(c16907.74,10570.31) 16943.11,10569.88 ; 16943.06,10572.32 cw(c16907.74,10570.31) 16943.11,10569.88 ; 16943.06,10572.32 cw(c16907.74,10570.31) 16943.11,10569.88 ; 16943.06,10572.32 cw(c16907.74,10570.31) 16943.11,10569.88 ; 16943.06,10572.32 cw(c16907.74,10570.31) 16943.11,10569.88 ; 16943.06,10572.32 cw(c16907.74,10570.31) 16943.11,10569.88 ; 16943.06,10572.32 cw(c16907.74,10570.31) 16943.11,10569.88 ; 16943.06,10572.32 cw(c16907.74,10570.31) 16943.11,10569.88 ; 16943.06,10572.32 cw(c16907.74,10570.31) 16943.11,10569.88
  Bottom 6+gnd w5: v1@16908.46,9713.75 U2.5@16908.46,9775.59 ; R58.2@18144.17,10807.66 18179.1,10807.66 v1(18179.31,10807.45)
D3: IC1.115 R59.2 U1.7 U2.7 | length 3756.2
  Top Layer 1 w5: v1@16844.88,10176.1 16844.88,10193.72 U1.7@16845.23,10235.48 ; IC1.115@16861.54,11311.42 16861.54,10682.28 v1(16885,10658.82)
  Unused w5: v1@16845.96,10174.38 v1(16845.23,10174.13) ; v1(18179.31,10847.45) 18193.5,10813.36 cw(c18179.31,10807.45) 18194.15,10811.48 18214.56,10736.25 cw(c18180.42,10726.98) 18214.92,10734.8 18224.66,10692.07 cw(c18180.42,10681.98) 18225.79,10681.98 18225.79,10601.98 cw(c18180.42,10601.98) 18203.29,10562.8 18078.93,10490.22 cw(c18056.25,10529.09) 18068.42,10485.76 17859.86,10425.42 ccw(c17906.89,10262.58) 17844.61,10420.22 17786.69,10397.36 cw(c17770.06,10439.17) 17784.19,10396.45 17050.69,10153.37 ccw(c17068.11,10100.81) 17049.86,10153.09 17014.45,10140.76 cw(c17002.71,10174.13) 17002.71,10138.76 16971.21,10138.76 cw(c16971.21,10174.13) 16963.73,10139.56 16873.38,10159.13 cw(c16876.72,10174.13) 16869.78,10160.42 16848.55,10171.16 cw(c16850.81,10175.63) 16847.3,10172.06 v1(16845.23,10174.13) ; v1@16844.88,10176.1 cw(c16840.23,10174.28) v1@16845.23,10174.16 ; v1@16844.88,10176.1 cw(c16840.23,10174.28) v1@16845.23,10174.16 ; v1@16844.88,10176.1 cw(c16840.23,10174.28) v1@16845.23,10174.16 ; v1@16844.88,10176.1 cw(c16840.23,10174.28) v1@16845.23,10174.16 ; v1@16844.88,10176.1 cw(c16840.23,10174.28) v1@16845.23,10174.16 ; v1@16844.88,10176.1 cw(c16840.23,10174.28) v1@16845.23,10174.16 ; v1@16844.88,10176.1 cw(c16840.23,10174.28) v1@16845.23,10174.16 ; v1@16844.88,10176.1 cw(c16840.23,10174.28) v1@16845.23,10174.16 ; v1@16844.88,10176.1 cw(c16840.23,10174.28) v1@16845.23,10174.16 ; v1@16844.88,10176.1 cw(c16840.23,10174.28) v1@16845.23,10174.16 ; v1@16844.88,10176.1 cw(c16840.23,10174.28) v1@16845.23,10174.16 ; v1@16844.88,10176.1 cw(c16840.23,10174.28) v1@16845.23,10174.16 ; v1@16844.88,10176.1 cw(c16840.23,10174.28) v1@16845.23,10174.16 ; v1@16844.88,10176.1 cw(c16840.23,10174.28) v1@16845.23,10174.16
  Layer 3 w5: v1(16845.23,9713.5) 16845.23,9805.11 cw(c16850.23,9805.11) 16846.68,9808.64 16859.89,9821.89 ; 16860.85,10324.67 16860.85,10191.78 cw(c16855.85,10191.87) 16859.39,10188.34 v1(16845.23,10174.13) v1@16845.23,10172.06 ; 16860.85,10324.68 cw(c16865.85,10324.68) 16862.27,10328.16 16911,10378.08 ccw(c16900,10388.82) 16915.35,10387.97 16922.44,10516.36 ; v1(16885,10658.82) 16918.05,10602.23 cw(c16913.73,10599.71) 16918.67,10600.5 ; 16918.67,10600.47 16922.94,10572.64 cw(c16907.74,10570.31) 16923.11,10570.13 ; 16923.11,10570.12 16922.46,10517.01 ; v1@16845.23,10172.06 ccw(c16850.23,10172.07) v1@16846.47,10168.77 ; v1@16845.23,10172.06 ccw(c16850.23,10172.07) v1@16846.47,10168.77 ; v1@16845.23,10172.06 ccw(c16850.23,10172.07) v1@16846.47,10168.77 ; v1@16845.23,10172.06 ccw(c16850.23,10172.07) v1@16846.47,10168.77 ; v1@16845.23,10172.06 ccw(c16850.23,10172.07) v1@16846.47,10168.77 ; v1@16845.23,10172.06 ccw(c16850.23,10172.07) v1@16846.47,10168.77 ; v1@16845.23,10172.06 ccw(c16850.23,10172.07) v1@16846.47,10168.77 ; v1@16845.23,10172.06 ccw(c16850.23,10172.07) v1@16846.47,10168.77 ; v1@16845.23,10172.06 ccw(c16850.23,10172.07) v1@16846.47,10168.77 ; v1@16845.23,10172.06 ccw(c16850.23,10172.07) v1@16846.47,10168.77 ; v1@16845.23,10172.06 ccw(c16850.23,10172.07) v1@16846.47,10168.77 ; v1@16845.23,10172.06 ccw(c16850.23,10172.07) v1@16846.47,10168.77 ; v1@16845.23,10172.06 ccw(c16850.23,10172.07) v1@16846.47,10168.77 ; v1@16845.23,10172.06 ccw(c16850.23,10172.07) v1@16846.47,10168.77 ; v1@16845.23,10172.06 ccw(c16850.23,10172.07) v1@16846.47,10168.77 ; v1@16845.23,10172.06 ccw(c16850.23,10172.07) v1@16846.47,10168.77 ; v1@16846.47,10168.77 16860.11,10153.23 ; 16859.89,9821.89 ccw(c16856.35,9825.42) 16861.35,9825.33 ; 16859.89,9821.89 ccw(c16856.35,9825.42) 16861.35,9825.33 ; 16859.89,9821.89 ccw(c16856.35,9825.42) 16861.35,9825.33 ; 16859.89,9821.89 ccw(c16856.35,9825.42) 16861.35,9825.33 ; 16859.89,9821.89 ccw(c16856.35,9825.42) 16861.35,9825.33 ; 16859.89,9821.89 ccw(c16856.35,9825.42) 16861.35,9825.33 ; 16859.89,9821.89 ccw(c16856.35,9825.42) 16861.35,9825.33 ; 16859.89,9821.89 ccw(c16856.35,9825.42) 16861.35,9825.33 ; 16859.89,9821.89 ccw(c16856.35,9825.42) 16861.35,9825.33 ; 16859.89,9821.89 ccw(c16856.35,9825.42) 16861.35,9825.33 ; 16859.89,9821.89 ccw(c16856.35,9825.42) 16861.35,9825.33 ; 16859.89,9821.89 ccw(c16856.35,9825.42) 16861.35,9825.33 ; 16859.89,9821.89 ccw(c16856.35,9825.42) 16861.35,9825.33 ; 16859.89,9821.89 ccw(c16856.35,9825.42) 16861.35,9825.33 ; 16859.89,9821.89 ccw(c16856.35,9825.42) 16861.35,9825.33 ; 16859.89,9821.89 ccw(c16856.35,9825.42) 16861.35,9825.33 ; 16860.11,10153.23 cw(c16856.35,10149.93) 16861.35,10150.02 ; 16860.11,10153.23 cw(c16856.35,10149.93) 16861.35,10150.02 ; 16860.11,10153.23 cw(c16856.35,10149.93) 16861.35,10150.02 ; 16860.11,10153.23 cw(c16856.35,10149.93) 16861.35,10150.02 ; 16860.11,10153.23 cw(c16856.35,10149.93) 16861.35,10150.02 ; 16860.11,10153.23 cw(c16856.35,10149.93) 16861.35,10150.02 ; 16860.11,10153.23 cw(c16856.35,10149.93) 16861.35,10150.02 ; 16860.11,10153.23 cw(c16856.35,10149.93) 16861.35,10150.02 ; 16860.11,10153.23 cw(c16856.35,10149.93) 16861.35,10150.02 ; 16860.11,10153.23 cw(c16856.35,10149.93) 16861.35,10150.02 ; 16860.11,10153.23 cw(c16856.35,10149.93) 16861.35,10150.02 ; 16860.11,10153.23 cw(c16856.35,10149.93) 16861.35,10150.02 ; 16860.11,10153.23 cw(c16856.35,10149.93) 16861.35,10150.02 ; 16860.11,10153.23 cw(c16856.35,10149.93) 16861.35,10150.02 ; 16860.11,10153.23 cw(c16856.35,10149.93) 16861.35,10150.02 ; 16860.11,10153.23 cw(c16856.35,10149.93) 16861.35,10150.02 ; 16861.35,9825.33 16861.35,10150.02 ; 16922.44,10516.36 ccw(c16907.09,10517.2) 16922.46,10517.01 ; 16922.44,10516.36 ccw(c16907.09,10517.2) 16922.46,10517.01 ; 16922.44,10516.36 ccw(c16907.09,10517.2) 16922.46,10517.01 ; 16922.44,10516.36 ccw(c16907.09,10517.2) 16922.46,10517.01 ; 16922.44,10516.36 ccw(c16907.09,10517.2) 16922.46,10517.01 ; 16922.44,10516.36 ccw(c16907.09,10517.2) 16922.46,10517.01 ; 16922.44,10516.36 ccw(c16907.09,10517.2) 16922.46,10517.01 ; 16922.44,10516.36 ccw(c16907.09,10517.2) 16922.46,10517.01 ; 16922.44,10516.36 ccw(c16907.09,10517.2) 16922.46,10517.01 ; 16922.44,10516.36 ccw(c16907.09,10517.2) 16922.46,10517.01 ; 16922.44,10516.36 ccw(c16907.09,10517.2) 16922.46,10517.01 ; 16922.44,10516.36 ccw(c16907.09,10517.2) 16922.46,10517.01 ; 16922.44,10516.36 ccw(c16907.09,10517.2) 16922.46,10517.01 ; 16922.44,10516.36 ccw(c16907.09,10517.2) 16922.46,10517.01 ; 16922.44,10516.36 ccw(c16907.09,10517.2) 16922.46,10517.01 ; 16922.44,10516.36 ccw(c16907.09,10517.2) 16922.46,10517.01
  Bottom 6+gnd w5: v1@16845.47,9713.75 U2.7@16845.47,9775.59 ; R59.2@18144.17,10848.97 18145.28,10848.97 18177.79,10848.97 v1(18179.31,10847.45)
D4: IC1.58 R60.2 U1.8 U2.8 | length 4530.7
  Top Layer 1 w5: IC1.58@16704.06,10465.91 16704.45,10466.3 16704.45,10558.27 v1(16705.87,10559.69) ; v1@16813.39,10177.2 16813.39,10193.72 U1.8@16813.73,10235.48
  Unused w5: v1@16813.39,10177.2 ccw(c16818.39,10177.23) 16813.56,10175.96 16813.59,10175.85 cw(c16808.75,10174.58) 16813.74,10174.28 v1(16813.73,10174.13) ; v1(18179.31,10887.45) 18193.5,10853.36 cw(c18179.31,10847.45) 18194.16,10851.42 18224.26,10738.69 cw(c18180.42,10726.98) 18224.67,10737 18234.41,10694.29 cw(c18180.42,10681.98) 18235.79,10681.98 18235.79,10601.98 cw(c18180.42,10601.98) 18208.33,10554.16 18083.97,10481.59 cw(c18056.25,10529.09) 18071.2,10476.16 17862.59,10415.8 ccw(c17906.89,10262.58) 17848.3,10410.93 17790.35,10388.05 cw(c17770.06,10439.17) 17787.33,10386.96 17053.87,10143.89 ccw(c17068.11,10100.81) 17053.13,10143.64 17017.72,10131.31 cw(c17002.71,10174.13) 17002.71,10128.76 16971.21,10128.76 cw(c16971.21,10174.13) 16961.61,10129.79 16871.26,10149.35 cw(c16876.72,10174.13) 16868.74,10150.05 16840.34,10159.55 cw(c16845.23,10174.13) 16838.11,10160.51 16816.28,10171.91 cw(c16818.59,10176.34) 16815.1,10172.76 v1(16813.73,10174.13) ; v1(16813.73,10174.13) ccw(c16808.75,10174.58) 16813.4,10176.43 cw(c16808.75,10174.58) v1(16813.73,10174.13)
  Layer 3 w5: v1(16705.87,10559.69) 16735.03,10572.15 ; v1(16813.73,9713.5) 16813.73,9805.11 cw(c16818.73,9805.12) 16815.18,9808.63 16828.39,9821.89 ; 16876.71,10521.47 16885.65,10412.59 ; 16735.03,10572.15 cw(c16745,10548.82) 16745.08,10574.19 ; 16735.03,10572.15 cw(c16745,10548.82) 16745.08,10574.19 ; 16735.03,10572.15 cw(c16745,10548.82) 16745.08,10574.19 ; 16735.03,10572.15 cw(c16745,10548.82) 16745.08,10574.19 ; 16735.03,10572.15 cw(c16745,10548.82) 16745.08,10574.19 ; 16735.03,10572.15 cw(c16745,10548.82) 16745.08,10574.19 ; 16735.03,10572.15 cw(c16745,10548.82) 16745.08,10574.19 ; 16735.03,10572.15 cw(c16745,10548.82) 16745.08,10574.19 ; 16745.08,10574.19 16822.17,10573.96 ; 16822.17,10573.96 cw(c16822.09,10538.58) 16847.51,10563.18 ; 16822.17,10573.96 cw(c16822.09,10538.58) 16847.51,10563.18 ; 16822.17,10573.96 cw(c16822.09,10538.58) 16847.51,10563.18 ; 16822.17,10573.96 cw(c16822.09,10538.58) 16847.51,10563.18 ; 16822.17,10573.96 cw(c16822.09,10538.58) 16847.51,10563.18 ; 16822.17,10573.96 cw(c16822.09,10538.58) 16847.51,10563.18 ; 16822.17,10573.96 cw(c16822.09,10538.58) 16847.51,10563.18 ; 16822.17,10573.96 cw(c16822.09,10538.58) 16847.51,10563.18 ; 16822.17,10573.96 cw(c16822.09,10538.58) 16847.51,10563.18 ; 16822.17,10573.96 cw(c16822.09,10538.58) 16847.51,10563.18 ; 16822.17,10573.96 cw(c16822.09,10538.58) 16847.51,10563.18 ; 16822.17,10573.96 cw(c16822.09,10538.58) 16847.51,10563.18 ; 16822.17,10573.96 cw(c16822.09,10538.58) 16847.51,10563.18 ; 16822.17,10573.96 cw(c16822.09,10538.58) 16847.51,10563.18 ; 16822.17,10573.96 cw(c16822.09,10538.58) 16847.51,10563.18 ; 16822.17,10573.96 cw(c16822.09,10538.58) 16847.51,10563.18 ; 16828.39,9821.89 ccw(c16824.85,9825.42) 16829.85,9825.33 ; 16828.39,9821.89 ccw(c16824.85,9825.42) 16829.85,9825.33 ; 16828.39,9821.89 ccw(c16824.85,9825.42) 16829.85,9825.33 ; 16828.39,9821.89 ccw(c16824.85,9825.42) 16829.85,9825.33 ; 16828.39,9821.89 ccw(c16824.85,9825.42) 16829.85,9825.33 ; 16828.39,9821.89 ccw(c16824.85,9825.42) 16829.85,9825.33 ; 16828.39,9821.89 ccw(c16824.85,9825.42) 16829.85,9825.33 ; 16828.39,9821.89 ccw(c16824.85,9825.42) 16829.85,9825.33 ; 16828.39,9821.89 ccw(c16824.85,9825.42) 16829.85,9825.33 ; 16828.39,9821.89 ccw(c16824.85,9825.42) 16829.85,9825.33 ; 16828.39,9821.89 ccw(c16824.85,9825.42) 16829.85,9825.33 ; 16828.39,9821.89 ccw(c16824.85,9825.42) 16829.85,9825.33 ; 16828.39,9821.89 ccw(c16824.85,9825.42) 16829.85,9825.33 ; 16828.39,9821.89 ccw(c16824.85,9825.42) 16829.85,9825.33 ; 16828.39,9821.89 ccw(c16824.85,9825.42) 16829.85,9825.33 ; 16828.39,9821.89 ccw(c16824.85,9825.42) 16829.85,9825.33 ; 16828.8,10152.99 cw(c16824.85,10149.93) 16829.85,10150.02 ; 16828.8,10152.99 cw(c16824.85,10149.93) 16829.85,10150.02 ; 16828.8,10152.99 cw(c16824.85,10149.93) 16829.85,10150.02 ; 16828.8,10152.99 cw(c16824.85,10149.93) 16829.85,10150.02 ; 16828.8,10152.99 cw(c16824.85,10149.93) 16829.85,10150.02 ; 16828.8,10152.99 cw(c16824.85,10149.93) 16829.85,10150.02 ; 16828.8,10152.99 cw(c16824.85,10149.93) 16829.85,10150.02 ; 16828.8,10152.99 cw(c16824.85,10149.93) 16829.85,10150.02 ; 16828.8,10152.99 cw(c16824.85,10149.93) 16829.85,10150.02 ; 16828.8,10152.99 cw(c16824.85,10149.93) 16829.85,10150.02 ; 16828.8,10152.99 cw(c16824.85,10149.93) 16829.85,10150.02 ; 16828.8,10152.99 cw(c16824.85,10149.93) 16829.85,10150.02 ; 16828.8,10152.99 cw(c16824.85,10149.93) 16829.85,10150.02 ; 16828.8,10152.99 cw(c16824.85,10149.93) 16829.85,10150.02 ; 16828.8,10152.99 cw(c16824.85,10149.93) 16829.85,10150.02 ; 16828.8,10152.99 cw(c16824.85,10149.93) 16829.85,10150.02 ; 16828.8,10152.99 16814.79,10171.06 cw(c16818.73,10174.13) v1(16813.73,10174.13) 16813.73,10174.19 cw(c16818.73,10174.13) 16814.53,10176.85 16829.3,10199.68 ; 16829.3,10199.68 ccw(c16825.1,10202.4) 16830.1,10202.31 ; 16829.3,10199.68 ccw(c16825.1,10202.4) 16830.1,10202.31 ; 16829.3,10199.68 ccw(c16825.1,10202.4) 16830.1,10202.31 ; 16829.3,10199.68 ccw(c16825.1,10202.4) 16830.1,10202.31 ; 16829.3,10199.68 ccw(c16825.1,10202.4) 16830.1,10202.31 ; 16829.3,10199.68 ccw(c16825.1,10202.4) 16830.1,10202.31 ; 16829.3,10199.68 ccw(c16825.1,10202.4) 16830.1,10202.31 ; 16829.3,10199.68 ccw(c16825.1,10202.4) 16830.1,10202.31 ; 16829.3,10199.68 ccw(c16825.1,10202.4) 16830.1,10202.31 ; 16829.3,10199.68 ccw(c16825.1,10202.4) 16830.1,10202.31 ; 16829.3,10199.68 ccw(c16825.1,10202.4) 16830.1,10202.31 ; 16829.3,10199.68 ccw(c16825.1,10202.4) 16830.1,10202.31 ; 16829.3,10199.68 ccw(c16825.1,10202.4) 16830.1,10202.31 ; 16829.3,10199.68 ccw(c16825.1,10202.4) 16830.1,10202.31 ; 16829.3,10199.68 ccw(c16825.1,10202.4) 16830.1,10202.31 ; 16829.3,10199.68 ccw(c16825.1,10202.4) 16830.1,10202.31 ; 16829.85,9825.33 16829.85,10150.02 ; 16830.1,10202.31 16830.1,10341.5 ; 16830.1,10341.5 cw(c16835.1,10341.5) 16831.55,10345.01 ; 16830.1,10341.5 cw(c16835.1,10341.5) 16831.55,10345.01 ; 16830.1,10341.5 cw(c16835.1,10341.5) 16831.55,10345.01 ; 16830.1,10341.5 cw(c16835.1,10341.5) 16831.55,10345.01 ; 16830.1,10341.5 cw(c16835.1,10341.5) 16831.55,10345.01 ; 16830.1,10341.5 cw(c16835.1,10341.5) 16831.55,10345.01 ; 16830.1,10341.5 cw(c16835.1,10341.5) 16831.55,10345.01 ; 16830.1,10341.5 cw(c16835.1,10341.5) 16831.55,10345.01 ; 16830.1,10341.5 cw(c16835.1,10341.5) 16831.55,10345.01 ; 16830.1,10341.5 cw(c16835.1,10341.5) 16831.55,10345.01 ; 16830.1,10341.5 cw(c16835.1,10341.5) 16831.55,10345.01 ; 16830.1,10341.5 cw(c16835.1,10341.5) 16831.55,10345.01 ; 16830.1,10341.5 cw(c16835.1,10341.5) 16831.55,10345.01 ; 16830.1,10341.5 cw(c16835.1,10341.5) 16831.55,10345.01 ; 16830.1,10341.5 cw(c16835.1,10341.5) 16831.55,10345.01 ; 16830.1,10341.5 cw(c16835.1,10341.5) 16831.55,10345.01 ; 16831.55,10345.01 16833.13,10346.59 ; 16833.13,10346.59 ccw(c16815.15,10364.5) 16833.26,10346.72 ; 16833.13,10346.59 ccw(c16815.15,10364.5) 16833.26,10346.72 ; 16833.13,10346.59 ccw(c16815.15,10364.5) 16833.26,10346.72 ; 16833.13,10346.59 ccw(c16815.15,10364.5) 16833.26,10346.72 ; 16833.13,10346.59 ccw(c16815.15,10364.5) 16833.26,10346.72 ; 16833.13,10346.59 ccw(c16815.15,10364.5) 16833.26,10346.72 ; 16833.13,10346.59 ccw(c16815.15,10364.5) 16833.26,10346.72 ; 16833.13,10346.59 ccw(c16815.15,10364.5) 16833.26,10346.72 ; 16833.13,10346.59 ccw(c16815.15,10364.5) 16833.26,10346.72 ; 16833.13,10346.59 ccw(c16815.15,10364.5) 16833.26,10346.72 ; 16833.13,10346.59 ccw(c16815.15,10364.5) 16833.26,10346.72 ; 16833.13,10346.59 ccw(c16815.15,10364.5) 16833.26,10346.72 ; 16833.13,10346.59 ccw(c16815.15,10364.5) 16833.26,10346.72 ; 16833.13,10346.59 ccw(c16815.15,10364.5) 16833.26,10346.72 ; 16833.13,10346.59 ccw(c16815.15,10364.5) 16833.26,10346.72 ; 16833.13,10346.59 ccw(c16815.15,10364.5) 16833.26,10346.72 ; 16833.26,10346.72 16878.46,10392.74 ; 16847.51,10563.18 16866.83,10543.23 ; 16866.83,10543.23 cw(c16841.46,10518.58) 16876.71,10521.48 ; 16866.83,10543.23 cw(c16841.46,10518.58) 16876.71,10521.48 ; 16866.83,10543.23 cw(c16841.46,10518.58) 16876.71,10521.48 ; 16866.83,10543.23 cw(c16841.46,10518.58) 16876.71,10521.48 ; 16866.83,10543.23 cw(c16841.46,10518.58) 16876.71,10521.48 ; 16866.83,10543.23 cw(c16841.46,10518.58) 16876.71,10521.48 ; 16866.83,10543.23 cw(c16841.46,10518.58) 16876.71,10521.48 ; 16866.83,10543.23 cw(c16841.46,10518.58) 16876.71,10521.48 ; 16866.83,10543.23 cw(c16841.46,10518.58) 16876.71,10521.48 ; 16866.83,10543.23 cw(c16841.46,10518.58) 16876.71,10521.48 ; 16866.83,10543.23 cw(c16841.46,10518.58) 16876.71,10521.48 ; 16866.83,10543.23 cw(c16841.46,10518.58) 16876.71,10521.48 ; 16866.83,10543.23 cw(c16841.46,10518.58) 16876.71,10521.48 ; 16866.83,10543.23 cw(c16841.46,10518.58) 16876.71,10521.48 ; 16866.83,10543.23 cw(c16841.46,10518.58) 16876.71,10521.48 ; 16866.83,10543.23 cw(c16841.46,10518.58) 16876.71,10521.48 ; 16878.46,10392.74 ccw(c16860.36,10410.52) 16885.65,10412.59 ; 16878.46,10392.74 ccw(c16860.36,10410.52) 16885.65,10412.59 ; 16878.46,10392.74 ccw(c16860.36,10410.52) 16885.65,10412.59 ; 16878.46,10392.74 ccw(c16860.36,10410.52) 16885.65,10412.59 ; 16878.46,10392.74 ccw(c16860.36,10410.52) 16885.65,10412.59 ; 16878.46,10392.74 ccw(c16860.36,10410.52) 16885.65,10412.59 ; 16878.46,10392.74 ccw(c16860.36,10410.52) 16885.65,10412.59 ; 16878.46,10392.74 ccw(c16860.36,10410.52) 16885.65,10412.59 ; 16878.46,10392.74 ccw(c16860.36,10410.52) 16885.65,10412.59 ; 16878.46,10392.74 ccw(c16860.36,10410.52) 16885.65,10412.59 ; 16878.46,10392.74 ccw(c16860.36,10410.52) 16885.65,10412.59 ; 16878.46,10392.74 ccw(c16860.36,10410.52) 16885.65,10412.59 ; 16878.46,10392.74 ccw(c16860.36,10410.52) 16885.65,10412.59 ; 16878.46,10392.74 ccw(c16860.36,10410.52) 16885.65,10412.59 ; 16878.46,10392.74 ccw(c16860.36,10410.52) 16885.65,10412.59 ; 16878.46,10392.74 ccw(c16860.36,10410.52) 16885.65,10412.59
  Bottom 6+gnd w5: v1@16813.98,9713.75 U2.8@16813.98,9775.59 ; R60.2@18144.17,10890.29 18145,10890.11 18157.54,10887.45 v1(18179.31,10887.45)
D5: IC1.59 R61.2 U1.10 U2.10 | length 4236.6
  Top Layer 1 w5: IC1.59@16723.58,10466.06 16724.15,10466.63 16724.15,10518.01 v1(16724.72,10518.58) ; v1(16750.74,10174.13) 16750.74,10193.72 U1.10@16750.98,10236.22
  Unused w5: v1(16750.74,10174.13) 16752.28,10172.64 ccw(c16755.74,10176.25) 16753.15,10171.98 16774.59,10158.97 ccw(c16782.5,10172.15) 16779.4,10157.09 16959.99,10119.91 ccw(c16971.21,10174.13) 16971.21,10118.76 17002.71,10118.76 ccw(c17002.71,10174.13) 17020.98,10121.86 17056.46,10134.21 cw(c17068.11,10100.81) 17056.99,10134.39 17790.47,10377.46 ccw(c17770.06,10439.17) 17794,10378.74 17852,10401.64 cw(c17906.89,10262.58) 17865.38,10406.2 18073.98,10466.55 ccw(c18056.25,10529.09) 18089.01,10472.95 18213.37,10545.52 ccw(c18180.42,10601.98) 18245.79,10601.98 18245.79,10681.98 ccw(c18180.42,10681.98) 18244.16,10696.49 18234.43,10739.21 ccw(c18180.42,10726.98) 18233.95,10741.16 18194.17,10891.39 ccw(c18179.31,10887.45) 18193.76,10892.71 v1(18179.31,10932.45)
  Layer 3 w5: v1(16724.72,10518.58) 16729.81,10551.19 cw(c16745,10548.82) 16745.05,10564.19 16822.16,10563.96 ; v1(16750.74,9713.5) 16750.74,9805.11 cw(c16755.74,9805.12) 16752.18,9808.63 16765.4,9821.89 ; v1@16750.74,10172.06 ccw(c16755.74,10172.07) v1@16751.98,10168.77 ; v1@16750.74,10172.06 ccw(c16755.74,10172.07) v1@16751.98,10168.77 ; v1@16750.74,10172.06 ccw(c16755.74,10172.07) v1@16751.98,10168.77 ; v1@16750.74,10172.06 ccw(c16755.74,10172.07) v1@16751.98,10168.77 ; v1@16750.74,10172.06 ccw(c16755.74,10172.07) v1@16751.98,10168.77 ; v1@16750.74,10172.06 ccw(c16755.74,10172.07) v1@16751.98,10168.77 ; v1@16750.74,10172.06 ccw(c16755.74,10172.07) v1@16751.98,10168.77 ; v1@16750.74,10172.06 ccw(c16755.74,10172.07) v1@16751.98,10168.77 ; v1@16750.74,10172.06 ccw(c16755.74,10172.07) v1@16751.98,10168.77 ; v1@16750.74,10172.06 ccw(c16755.74,10172.07) v1@16751.98,10168.77 ; v1@16750.74,10172.06 ccw(c16755.74,10172.07) v1@16751.98,10168.77 ; v1@16750.74,10172.06 ccw(c16755.74,10172.07) v1@16751.98,10168.77 ; v1@16750.74,10172.06 ccw(c16755.74,10172.07) v1@16751.98,10168.77 ; v1@16750.74,10172.06 ccw(c16755.74,10172.07) v1@16751.98,10168.77 ; v1@16750.74,10172.06 ccw(c16755.74,10172.07) v1@16751.98,10168.77 ; v1@16750.74,10172.06 ccw(c16755.74,10172.07) v1@16751.98,10168.77 ; v1@16750.74,10172.06 v1(16750.74,10174.13) 16764.99,10188.43 ccw(c16761.45,10191.96) 16766.45,10191.87 16766.45,10344.72 cw(c16771.45,10344.72) 16768.45,10348.72 16805.94,10376.81 ; v1@16751.98,10168.77 16765.62,10153.23 ; 16765.4,9821.89 ccw(c16761.86,9825.42) 16766.86,9825.33 ; 16765.4,9821.89 ccw(c16761.86,9825.42) 16766.86,9825.33 ; 16765.4,9821.89 ccw(c16761.86,9825.42) 16766.86,9825.33 ; 16765.4,9821.89 ccw(c16761.86,9825.42) 16766.86,9825.33 ; 16765.4,9821.89 ccw(c16761.86,9825.42) 16766.86,9825.33 ; 16765.4,9821.89 ccw(c16761.86,9825.42) 16766.86,9825.33 ; 16765.4,9821.89 ccw(c16761.86,9825.42) 16766.86,9825.33 ; 16765.4,9821.89 ccw(c16761.86,9825.42) 16766.86,9825.33 ; 16765.4,9821.89 ccw(c16761.86,9825.42) 16766.86,9825.33 ; 16765.4,9821.89 ccw(c16761.86,9825.42) 16766.86,9825.33 ; 16765.4,9821.89 ccw(c16761.86,9825.42) 16766.86,9825.33 ; 16765.4,9821.89 ccw(c16761.86,9825.42) 16766.86,9825.33 ; 16765.4,9821.89 ccw(c16761.86,9825.42) 16766.86,9825.33 ; 16765.4,9821.89 ccw(c16761.86,9825.42) 16766.86,9825.33 ; 16765.4,9821.89 ccw(c16761.86,9825.42) 16766.86,9825.33 ; 16765.4,9821.89 ccw(c16761.86,9825.42) 16766.86,9825.33 ; 16765.62,10153.23 cw(c16761.86,10149.93) 16766.86,10150.02 ; 16765.62,10153.23 cw(c16761.86,10149.93) 16766.86,10150.02 ; 16765.62,10153.23 cw(c16761.86,10149.93) 16766.86,10150.02 ; 16765.62,10153.23 cw(c16761.86,10149.93) 16766.86,10150.02 ; 16765.62,10153.23 cw(c16761.86,10149.93) 16766.86,10150.02 ; 16765.62,10153.23 cw(c16761.86,10149.93) 16766.86,10150.02 ; 16765.62,10153.23 cw(c16761.86,10149.93) 16766.86,10150.02 ; 16765.62,10153.23 cw(c16761.86,10149.93) 16766.86,10150.02 ; 16765.62,10153.23 cw(c16761.86,10149.93) 16766.86,10150.02 ; 16765.62,10153.23 cw(c16761.86,10149.93) 16766.86,10150.02 ; 16765.62,10153.23 cw(c16761.86,10149.93) 16766.86,10150.02 ; 16765.62,10153.23 cw(c16761.86,10149.93) 16766.86,10150.02 ; 16765.62,10153.23 cw(c16761.86,10149.93) 16766.86,10150.02 ; 16765.62,10153.23 cw(c16761.86,10149.93) 16766.86,10150.02 ; 16765.62,10153.23 cw(c16761.86,10149.93) 16766.86,10150.02 ; 16765.62,10153.23 cw(c16761.86,10149.93) 16766.86,10150.02 ; 16766.86,9825.33 16766.86,10150.02 ; 16805.94,10376.81 cw(c16815.15,10364.5) 16807.48,10377.83 ; 16805.94,10376.81 cw(c16815.15,10364.5) 16807.48,10377.83 ; 16805.94,10376.81 cw(c16815.15,10364.5) 16807.48,10377.83 ; 16805.94,10376.81 cw(c16815.15,10364.5) 16807.48,10377.83 ; 16805.94,10376.81 cw(c16815.15,10364.5) 16807.48,10377.83 ; 16805.94,10376.81 cw(c16815.15,10364.5) 16807.48,10377.83 ; 16805.94,10376.81 cw(c16815.15,10364.5) 16807.48,10377.83 ; 16805.94,10376.81 cw(c16815.15,10364.5) 16807.48,10377.83 ; 16805.94,10376.81 cw(c16815.15,10364.5) 16807.48,10377.83 ; 16805.94,10376.81 cw(c16815.15,10364.5) 16807.48,10377.83 ; 16805.94,10376.81 cw(c16815.15,10364.5) 16807.48,10377.83 ; 16805.94,10376.81 cw(c16815.15,10364.5) 16807.48,10377.83 ; 16805.94,10376.81 cw(c16815.15,10364.5) 16807.48,10377.83 ; 16805.94,10376.81 cw(c16815.15,10364.5) 16807.48,10377.83 ; 16805.94,10376.81 cw(c16815.15,10364.5) 16807.48,10377.83 ; 16805.94,10376.81 cw(c16815.15,10364.5) 16807.48,10377.83 ; 16807.48,10377.83 16832.33,10392.14 ; 16822.16,10563.96 cw(c16822.09,10538.58) 16840.32,10556.23 ; 16822.16,10563.96 cw(c16822.09,10538.58) 16840.32,10556.23 ; 16822.16,10563.96 cw(c16822.09,10538.58) 16840.32,10556.23 ; 16822.16,10563.96 cw(c16822.09,10538.58) 16840.32,10556.23 ; 16822.16,10563.96 cw(c16822.09,10538.58) 16840.32,10556.23 ; 16822.16,10563.96 cw(c16822.09,10538.58) 16840.32,10556.23 ; 16822.16,10563.96 cw(c16822.09,10538.58) 16840.32,10556.23 ; 16822.16,10563.96 cw(c16822.09,10538.58) 16840.32,10556.23 ; 16822.16,10563.96 cw(c16822.09,10538.58) 16840.32,10556.23 ; 16822.16,10563.96 cw(c16822.09,10538.58) 16840.32,10556.23 ; 16822.16,10563.96 cw(c16822.09,10538.58) 16840.32,10556.23 ; 16822.16,10563.96 cw(c16822.09,10538.58) 16840.32,10556.23 ; 16822.16,10563.96 cw(c16822.09,10538.58) 16840.32,10556.23 ; 16822.16,10563.96 cw(c16822.09,10538.58) 16840.32,10556.23 ; 16822.16,10563.96 cw(c16822.09,10538.58) 16840.32,10556.23 ; 16822.16,10563.96 cw(c16822.09,10538.58) 16840.32,10556.23 ; 16832.33,10392.14 cw(c16840,10378.82) 16839.3,10394.18 ; 16832.33,10392.14 cw(c16840,10378.82) 16839.3,10394.18 ; 16832.33,10392.14 cw(c16840,10378.82) 16839.3,10394.18 ; 16832.33,10392.14 cw(c16840,10378.82) 16839.3,10394.18 ; 16832.33,10392.14 cw(c16840,10378.82) 16839.3,10394.18 ; 16832.33,10392.14 cw(c16840,10378.82) 16839.3,10394.18 ; 16832.33,10392.14 cw(c16840,10378.82) 16839.3,10394.18 ; 16832.33,10392.14 cw(c16840,10378.82) 16839.3,10394.18 ; 16832.33,10392.14 cw(c16840,10378.82) 16839.3,10394.18 ; 16832.33,10392.14 cw(c16840,10378.82) 16839.3,10394.18 ; 16832.33,10392.14 cw(c16840,10378.82) 16839.3,10394.18 ; 16832.33,10392.14 cw(c16840,10378.82) 16839.3,10394.18 ; 16832.33,10392.14 cw(c16840,10378.82) 16839.3,10394.18 ; 16832.33,10392.14 cw(c16840,10378.82) 16839.3,10394.18 ; 16832.33,10392.14 cw(c16840,10378.82) 16839.3,10394.18 ; 16832.33,10392.14 cw(c16840,10378.82) 16839.3,10394.18 ; 16839.3,10394.18 16861.05,10395.16 ; 16840.32,10556.23 16859.68,10536.23 cw(c16841.46,10518.58) 16866.75,10520.66 16875.68,10411.78 ; 16861.05,10395.16 ccw(c16860.36,10410.52) 16875.68,10411.78 ; 16861.05,10395.16 ccw(c16860.36,10410.52) 16875.68,10411.78 ; 16861.05,10395.16 ccw(c16860.36,10410.52) 16875.68,10411.78 ; 16861.05,10395.16 ccw(c16860.36,10410.52) 16875.68,10411.78 ; 16861.05,10395.16 ccw(c16860.36,10410.52) 16875.68,10411.78 ; 16861.05,10395.16 ccw(c16860.36,10410.52) 16875.68,10411.78 ; 16861.05,10395.16 ccw(c16860.36,10410.52) 16875.68,10411.78 ; 16861.05,10395.16 ccw(c16860.36,10410.52) 16875.68,10411.78 ; 16861.05,10395.16 ccw(c16860.36,10410.52) 16875.68,10411.78 ; 16861.05,10395.16 ccw(c16860.36,10410.52) 16875.68,10411.78 ; 16861.05,10395.16 ccw(c16860.36,10410.52) 16875.68,10411.78 ; 16861.05,10395.16 ccw(c16860.36,10410.52) 16875.68,10411.78 ; 16861.05,10395.16 ccw(c16860.36,10410.52) 16875.68,10411.78 ; 16861.05,10395.16 ccw(c16860.36,10410.52) 16875.68,10411.78 ; 16861.05,10395.16 ccw(c16860.36,10410.52) 16875.68,10411.78 ; 16861.05,10395.16 ccw(c16860.36,10410.52) 16875.68,10411.78
  Bottom 6+gnd w5: v1@16750.98,9713.75 U2.10@16750.98,9775.59 ; R61.2@18144.17,10931.6 18178.46,10931.6 v1(18179.31,10932.45)